# Altium PCB Glucometer-InstrumentationCircuit-1Cara.PcbDoc
Units mm, origin at the board's own origin, x right, y up, seen from the top; angles counter-clockwise.
Board outline 36.56 x 28.12 mm, 2 copper layers (Top Layer, Bottom Layer); 11 components, 11 nets, 47 pads, 0 vias.
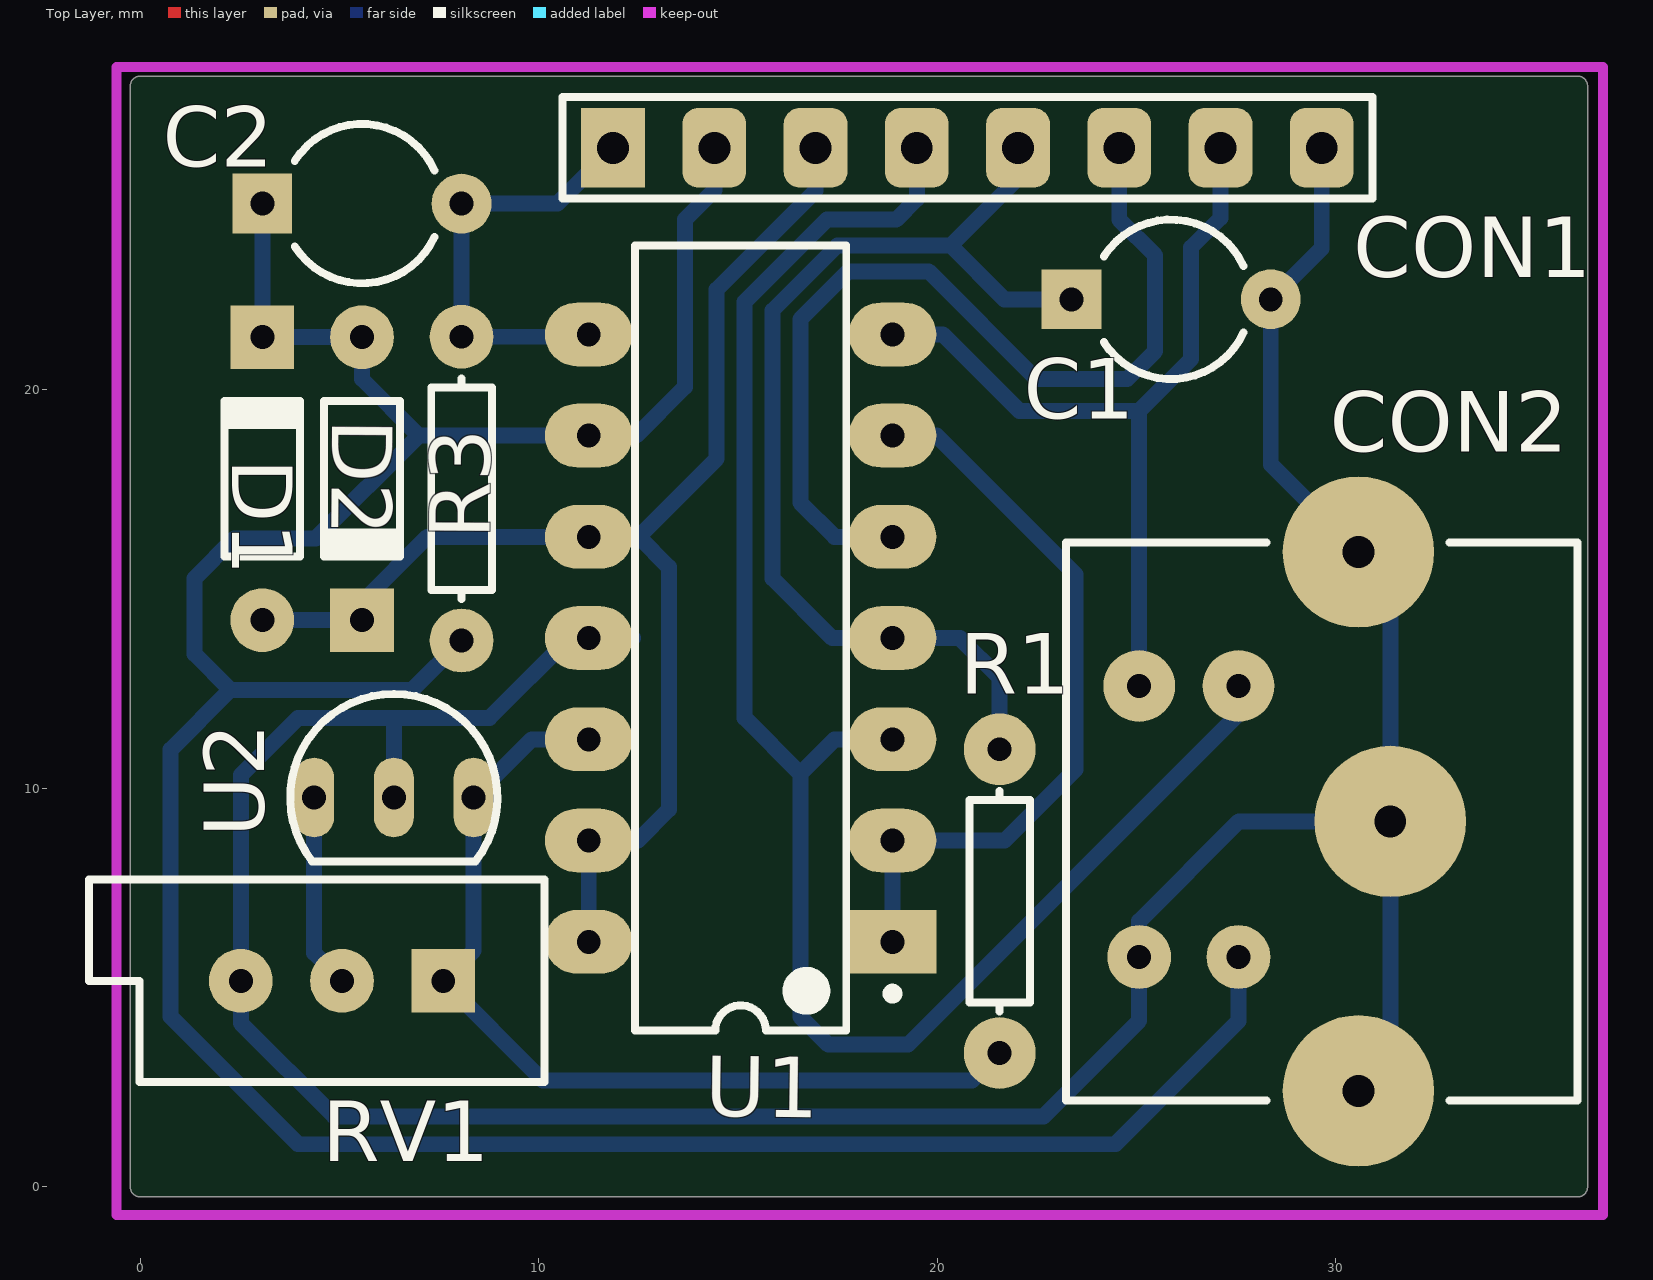
[diagram p0: Top Layer view]
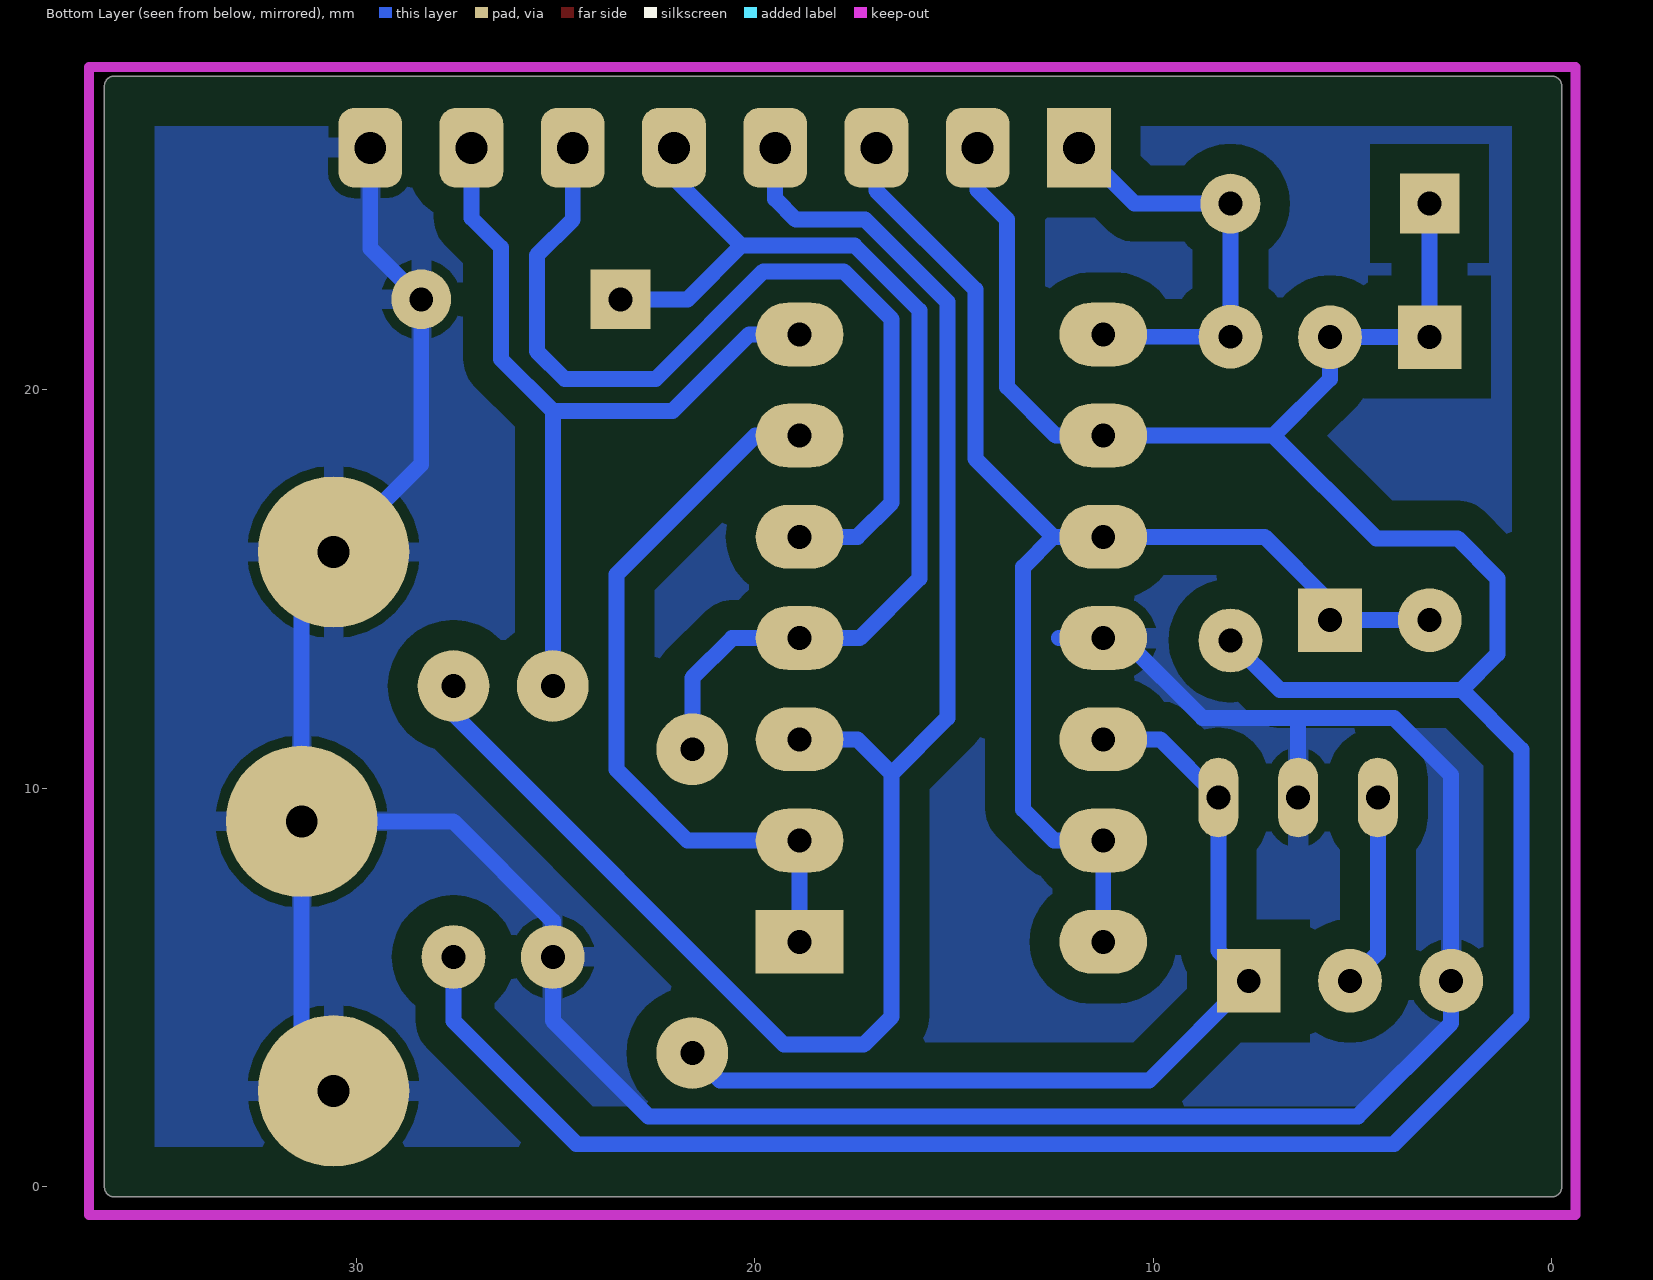
[diagram p1: Bottom Layer view, seen from below]

## Layer stack, top to bottom
Top Layer: signal copper 0.0356
Dielectric: dielectric 0.32, FR-4, Dk 4.8
Bottom Layer: signal copper 0.0356

## Board outline
-0.25,0 ccw(c0,0) 0,-0.25 36.062,-0.25 ccw(c36.062,0) 36.313,0 36.313,27.621 ccw(c36.062,27.621) 36.062,27.872 0,27.872 ccw(c0,27.621) -0.25,27.621

## Design rules (kind name [scope] priority, off if disabled: settings)
AssemblyTestPointUsage AssemblyTestPointUsage_1 [All] p2:
AssemblyTestpoint AssemblyTestpoint_1 [All] p2: testpointundercomponent=TRUE minsize=1.016 maxsize=2.54 preferedsize=1.524 minholesize=0 maxholesize=1.016 preferedholesize=0.813 testpointgrid=0.025 usegrid=TRUE gridtolerance=0 allowsidetop=TRUE allowsidebottom=TRUE
Clearance [All] p1: gap=0.25
ComponentClearance ComponentClearance_1 [All] p2: gap=0.254 collisioncheckmode=3 verticalgap=0.254 showdistances=FALSE
DiffPairsRouting DiffPairsRouting_1 [All] p2: maxlimit=0.254 minlimit=0.254 mostfreqgap=0.254 maxuncoupledlength=12.7
FabricationTestPointUsage TestPointUsage [All] p2: valid=0 allowmultiple=FALSE
FabricationTestpoint Testpoint [All] p2: side=3 testpointundercomponent=TRUE minsize=1.016 maxsize=2.54 preferedsize=1.524 minholesize=0 maxholesize=1.016 preferedholesize=0.813 testpointgrid=0.025 allowsidetop=TRUE allowsidebottom=TRUE usegrid=TRUE gridtolerance=0
FanoutControl Fanout_LCC [IsLCC] p1: bgadir=Out bgaviamode=Centered fanoutstyle=Auto fanoutdirection=Alternating viagrid=0.025 // Fanout_LCC (Default Rule)
FanoutControl Fanout_BGA [IsBGA] p2: bgadir=Out bgaviamode=Centered fanoutstyle=Auto fanoutdirection=Alternating viagrid=0.025 // Fanout_BGA (Default Rule)
FanoutControl Fanout_Default [All] p4: bgadir=Out bgaviamode=Centered fanoutstyle=Auto fanoutdirection=Alternating viagrid=0.025 // Fanout_Default (Default Rule)
FanoutControl Fanout_Small [(CompPinCount < 5)] p5: bgadir=Out bgaviamode=Centered fanoutstyle=Auto fanoutdirection=OutThenIn viagrid=0.025 // Fanout_Small (Default Rule)
FanoutControl Fanout_BGA_1 [IsBGA] p6: bgadir=Out bgaviamode=Centered fanoutstyle=Auto fanoutdirection=Alternating viagrid=0.025 // Fanout_BGA (Default Rule)
FanoutControl Fanout_LCC_1 [IsLCC] p7: bgadir=Out bgaviamode=Centered fanoutstyle=Auto fanoutdirection=Alternating viagrid=0.025 // Fanout_LCC (Default Rule)
FanoutControl Fanout_SOIC_1 [IsSOIC] p8: bgadir=Out bgaviamode=Centered fanoutstyle=Auto fanoutdirection=Alternating viagrid=0.025 // Fanout_SOIC (Default Rule)
FanoutControl Fanout_Small_1 [(CompPinCount < 5)] p9: bgadir=Out bgaviamode=Centered fanoutstyle=Auto fanoutdirection=OutThenIn viagrid=0.025 // Fanout_Small (Default Rule)
FanoutControl Fanout_Default_1 [All] p10: bgadir=Out bgaviamode=Centered fanoutstyle=Auto fanoutdirection=Alternating viagrid=0.025 // Fanout_Default (Default Rule)
Height Height_1 [All] p2: minheight=0 maxheight=25.4 prefheight=12.7
HoleSize HoleSize_1 [All] p2: absolutevalues=TRUE maxlimit=2.54 minlimit=0.025 maxpercent=80.000 minpercent=20.000
HoleToHoleClearance HoleToHoleClearance_1 [All] p2: gap=0.254 allowstackedmicrovias=TRUE
LayerPairs LayerPairs_1 [All] p2: enforce=TRUE
MinimumSolderMaskSliver MinimumSolderMaskSliver_1 [All] p2: minsoldermaskwidth=0.254
NetAntennae NetAntennae_1 [All] p2: netantennaetolerance=0
PasteMaskExpansion PasteMaskExpansion_1 [All] p2: expansion=0
PlaneClearance PlaneClearance_1 [All] p2: clearance=0.508
PolygonConnect [All] p1: connectstyle=Relief reliefconductorwidth=0.5 reliefentries=4 polygonreliefangle="90 Angle" airgapwidth=0.254
PolygonConnect PolygonConnect_1 [All] p2: connectstyle=Relief reliefconductorwidth=0.254 reliefentries=4 polygonreliefangle="90 Angle" airgapwidth=0.254
RoutingPriority RoutingPriority_1 [All] p2: routingpriority=0
RoutingTopology RoutingTopology_1 [All] p2: topology=Shortest
RoutingVias [All] p1: holewidth=0.6 width=1.6 viastyle="Through Hole" minholewidth=0.711 minwidth=1.27 maxholewidth=0.711 maxwidth=1.27
ShortCircuit ShortCircuit_1 [All] p2: allowed=FALSE
SilkToSilkClearance SilkToSilkClearance_1 [All] p2: silktosilkclearance=0.254
SilkToSolderMaskClearance SilkscreenOverComponentPads [IsPad] p1: minsilkscreentomaskgap=0.254 clearancetoexposedcopper=TRUE
SilkToSolderMaskClearance SilkscreenOverComponentPads_1 [IsPad] p2: minsilkscreentomaskgap=0.254 clearancetoexposedcopper=TRUE
SolderMaskExpansion [All] p1: expansion=0.102
SolderMaskExpansion SolderMaskExpansion_1 [All] p2: expansion=0.102
UnRoutedNet UnRoutedNet_1 [All] p2:
Width [All] p1: maxlimit=5 minlimit=0.25 preferedwidth=0.4 minimp=50.000000 maximp=50.000000 favimp=50.000000
23 further rules are at their usual default settings.

## Components (designator, comment, footprint, x,y, rotation, side; value= is the part's Value field where it differs from the comment)
C1 "Cap2" CAPR5-4X5 25.862,22.271 r0 top
C2 "Cap2" CAPR5-4X5 5.562,24.671 r0 top
CON1 "Header 8" HDR1X8 11.862,26.071 r0 top
CON2 "" CDIN2.6-3H4A 36.062,9.171 r180 top
D1 "1N4148" DO-35 3.063,17.771 r90 top
D2 "1N4148" DO-35 5.563,17.771 r270 top
R1 "Res1" AXIAL-0.3#1 21.562,7.171 r90 top
R3 "Res3" AXIAL-0.3#2 8.062,17.521 r90 top
RV1 "RPot" VR5 5.062,5.171 r180 top
U1 "LMC6044IN" N14A 15.062,13.771 r180 top
U2 "LM385Z" LP03 6.362,9.771 r270 top

## Footprints (in the part's own frame and the unit in brackets; to place one, negate y for a bottom-side part, rotate by r counter-clockwise, add the part's x,y. Pads: shape width x height; smd on the part's side, far side on the other; paste and mask are expansions set on the pad)
AXIAL-0.3#1 [mm] "Axial Device, Thru-Hole; 2 Leads; 0.3 in Pin Spacing"
  round 1.8 hole 0.6: 1(-3.81,0) 2(3.81,0)
  silkscreen extent -2.77,-0.76 2.77,0.76
AXIAL-0.3#2 [mm] "Axial Device, Thru-Hole; 2 Leads; 0.3 in Pin Spacing"
  round 1.6 hole 0.6: 1(-3.81,0) 2(3.81,0)
  silkscreen extent -2.77,-0.76 2.77,0.76
CAPR5-4X5 [mm] "Capacitor; 2 Leads"
  rect 1.5x1.5 hole 0.6: 1(-2.5,0)
  round 1.5 hole 0.6: 2(2.5,0)
  silkscreen extent -1.69,-2 1.82,2
CDIN2.6-3H4A [mm] "Connector; Circular DIN, Thru-Hole; 4 Position; Right Angle; Pitch 2.1/2.6 mm; Body 14 x 12.84 x 13 mm (WxTxH), Shielded, Special PCB Retention"
  round 1.8 hole 0.6: 1(8.51,-3.4) 3(11,-3.4)
  round 1.6 hole 0.6: 2(8.51,3.4) 4(11,3.4)
  round 3.8 hole 0.8: MH1(5.5,-6.76) MH2(4.7,0) MH3(5.5,6.76)
  silkscreen extent 0,-7 12.84,7, body extent 0,-7 12.84,7, height 13
DO-35 [mm] "Diode, Axial; Body 3.8 x 1.9 mm (LxDia. max), Lead Dia. 0.53 mm (max)"
  round 1.6 hole 0.6: 1(-3.55,0)
  rect 1.6x1.6 hole 0.6: 2(3.55,0)
  silkscreen extent -1.95,-0.95 2.05,0.95
HDR1X8 [mm] "Connector; Header; 8 Position"
  rect 1.6x2 hole 0.8: 1(0,0)
  rrect50% 1.6x2 hole 0.8: 2(2.54,0) 3(5.08,0) 4(7.62,0) 5(10.16,0) 6(12.7,0) 7(15.24,0) 8(17.78,0)
  silkscreen extent -1.27,-1.27 19.05,1.27
LP03 [mm] "TO, Flat Index; 3 In-Line, Axial Leads; Body Dia. 4.8mm; Leads 0.56 x 0.41 mm (max)"
  oval 2x1 hole 0.6: 1(0,-2) 2(0,0) 3(0,2)
  silkscreen extent -2.6,-2.6 1.6,2.6
N14A [mm] "DIP, 14-Leads, Row Spacing 7.62mm, Pitch 2.54mm, Body 19.56x6.35mm"
  rect 2.2x1.6 hole 0.6: 1(-3.81,7.62)
  oval 2.2x1.6 hole 0.6: 2(-3.81,5.08) 3(-3.81,2.54) 4(-3.81,0) 5(-3.81,-2.54) 6(-3.81,-5.08) 7(-3.81,-7.62) 8(3.81,-7.62) 9(3.81,-5.08) 10(3.81,-2.54) 11(3.81,0) 12(3.81,2.54) 13(3.81,5.08) 14(3.81,7.62)
  silkscreen extent -3.94,-9.85 2.65,9.85, body extent -3.55,-9.85 3.55,9.85, height 5.08
VR5 [mm] "Thru-Hole; 3 Leads"
  rect 1.6x1.6 hole 0.6: 1(-2.54,0)
  round 1.6 hole 0.6: 2(0,0) 3(2.54,0)
  silkscreen extent -5.08,-2.54 6.35,2.54

## Part data
C1 C2: "Capacitor"
CON1: "Header, 8-Pin"
CON2: library part "MiniDin 4Pins - SuperVideo", "MiniDin 4 Pins"
D1 D2: "High Conductance Fast Diode"
R1 R3: "Resistor"
RV1: "Potentiometer"
U1: "CMOS Quad Micropower Operational Amplifier, 14-pin MDIP"
U2: "Adjustable Micropower Voltage Reference, 3-pin TO-92"

## Nets (pads, with @x,y where several pads share a name; then routed paths per layer and width w, separated by ;. In a path a pad name is that pad's centre, name@x,y a point inside that pad or via, vN(x,y) a via of type N, cw(c..) or ccw(c..) an arc to the next point about the centre after c; other vN are vias at no path point)
GND: C1.2 CON1.8 CON2.4 CON2.MH1 CON2.MH2 CON2.MH3 RV1.3 U1.11 U2.2 | length 79.6
  Bottom Layer w0.4: U2.2 6.362,11.771 ; 12.363,13.771 U1.11 10.763,13.771 8.762,11.771 6.362,11.771 ; CON1.8 29.642,23.551 C1.2 28.362,18.131 CON2.MH1 31.362,15.131 CON2.MH2 ; CON2.MH3 31.362,3.211 CON2.MH2 ; 6.362,11.771 3.962,11.771 2.522,10.331 2.522,4.111 4.862,1.771 22.662,1.771 25.062,4.171 CON2.4 25.062,6.671 27.562,9.171 CON2.MH2
NetC2_1: C2.1 CON1.2 CON2.2 D1.2 D2.1 R3.1 U1.9 | length 79.4
  Bottom Layer w0.4: C2.1 D1.2 D2.1 5.563,20.271 6.982,18.851 ; R3.1 6.822,12.471 2.262,12.471 ; CON1.2 14.402,25.011 13.662,24.271 13.662,20.071 12.442,18.851 U1.9 6.982,18.851 ; CON2.2@27.552,5.161 CON2.2 27.552,4.161 24.462,1.071 3.963,1.071 0.762,4.271 0.762,10.971 2.262,12.471 ; 2.262,12.471 1.362,13.371 1.362,15.271 2.362,16.271 4.402,16.271 6.982,18.851
NetC2_2: C2.2 CON1.1 R3.2 U1.8 | length 10.8
  Bottom Layer w0.4: U1.8@11.192,21.331 R3.2 C2.2 10.462,24.671 CON1.1
NetCON1_4: CON1.4 CON2.1 U1.3 | length 43.3
  Bottom Layer w0.4: U1.3 17.423,11.231 16.562,10.371 ; CON1.4 19.482,24.791 18.962,24.271 17.224,24.271 15.162,22.209 15.162,11.771 16.562,10.371 ; CON2.1 27.552,11.861 19.262,3.571 17.263,3.571 16.562,4.271 16.562,10.371
NetCON1_6: CON1.6 U1.5 | length 23.5
  Bottom Layer w0.4: U1.5 17.422,16.311 16.562,17.171 16.562,21.771 17.762,22.971 19.779,22.971 22.479,20.271 24.763,20.271 25.462,20.971 25.462,23.371 24.562,24.271 CON1.6
NetCON1_7: CON1.7 CON2.3 U1.7 | length 21.3
  Bottom Layer w0.4: U1.7 20.134,21.391 22.054,19.471 25.062,19.471 ; CON2.3 25.062,19.471 ; CON1.7 27.102,24.311 26.362,23.571 26.362,20.771 25.062,19.471
NetR1_1: R1.1 RV1.1 U1.12 U2.3 | length 23.7
  Bottom Layer w0.4: U1.12 9.823,11.231 U2.3 8.363,5.931 RV1.1 10.102,2.671 20.873,2.671 R1.1
NetRV1_3: RV1.2 U2.1 | length 4.9
  Bottom Layer w0.4: U2.1 4.362,5.871 RV1.2
NetU1_1: U1.1 U1.2 U1.6 | length 18.8
  Bottom Layer w0.4: U1.1 U1.2 21.682,8.691 23.462,10.471 23.462,15.371 19.982,18.851 U1.6
VCC: C1.1 CON1.5 R1.2 U1.4 | length 27.1
  Bottom Layer w0.4: R1.2 21.562,12.771 20.562,13.771 U1.4 17.362,13.771 15.862,15.271 15.862,21.99 17.493,23.621 20.332,23.621 ; CON1.5 22.022,25.311 20.332,23.621 ; C1.1 21.682,22.271 20.332,23.621
VGND: CON1.3 D1.1 D2.2 U1.10 U1.13 U1.14 | length 34.2
  Bottom Layer w0.4: D1.1 D2.2 ; D2.2@5.563,14.671 7.203,16.311 U1.10 12.503,16.311 ; U1.14 U1.13 12.483,8.691 13.262,9.471 13.262,15.551 12.503,16.311 ; CON1.3 16.942,24.996 14.462,22.516 14.462,18.271 12.503,16.311
  Bottom Layer w0.5: D2.2 D2.2@5.563,14.671

## Polygon pours and split planes (outlines as drawn)
GND on Bottom Layer "Bottom Layer-No Net" (solid, pour order 3): 0,27.621 36.062,27.621 36.062,0 0,0

## Keep-outs
Keep-Out Layer:
  lines w0.25: -0.6,-0.7 36.7,-0.7 36.7,28.1 -0.6,28.1 -0.6,-0.7

## Silkscreen, mask and mechanical layers (free items; w line width, h text height)
Mechanical 16:
  lines w0.127: -150.433,-29.004 -145.353,-29.004 ; -150.433,24.971 -145.353,24.971 ; -150.433,78.946 -145.353,78.946 ; -80.583,-82.979 -80.583,-77.899 ; -80.583,127.841 -80.583,132.921 ; -10.733,-82.979 -10.733,-77.899 ; -10.733,127.841 -10.733,132.921 ; 59.117,-82.979 59.117,-77.899 ; 59.117,127.841 59.117,132.921 ; 123.887,-29.004 128.967,-29.004 ; 123.887,24.971 128.967,24.971 ; 123.887,78.946 128.967,78.946 ; -150.433,-82.979 128.967,-82.979 128.967,132.921 -150.433,132.921 -150.433,-82.979 ; -145.353,-77.899 -145.353,127.841 123.887,127.841 123.887,-77.899 -145.353,-77.899
  text "1" at -116.109,129.492 h1.78
  text "2" at -46.242,129.492 h1.78
  text "3" at 23.481,129.492 h1.78
  text "4" at 93.357,129.492 h1.78
  text "A" at -148.528,103.635 h1.78
  text "A" at 125.792,103.635 h1.78
  text "B" at -148.528,49.66 h1.78
  text "B" at 125.792,49.66 h1.78
  text "C" at -148.528,-4.315 h1.78
  text "C" at 125.792,-4.315 h1.78
  text "D" at -148.528,-58.163 h1.78
  text "D" at 125.792,-58.163 h1.78
  text "1" at -116.109,-81.328 h1.78
  text "2" at -46.242,-81.328 h1.78
  text "3" at 23.481,-81.328 h1.78
  text "4" at 93.357,-81.328 h1.78

## Dimensions
36.7,28.1 to -0.6,28.1 on Keep-Out Layer
36.7,28.1 to 36.7,-0.7 on Keep-Out Layer

## Text inside footprints (layer, text, board x,y; h text height)
CON2: Mechanical 1 "PCB Edge" at 35.462,15.871 h0.25 r270